# Altium PCB Full_Power_Board.PcbDoc
Units mil, origin at the board's own origin, x right, y up, seen from the top; angles counter-clockwise.
Board outline 5565 x 2850 mil, 4 copper layers (Signal Layer 1, Power Plane, Ground Plane, Signal Layer 2), stack 33.234 mil thick; 140 components, 95 nets, 511 pads, 93 vias.
Unrouted connection lines stored in the file: 1.
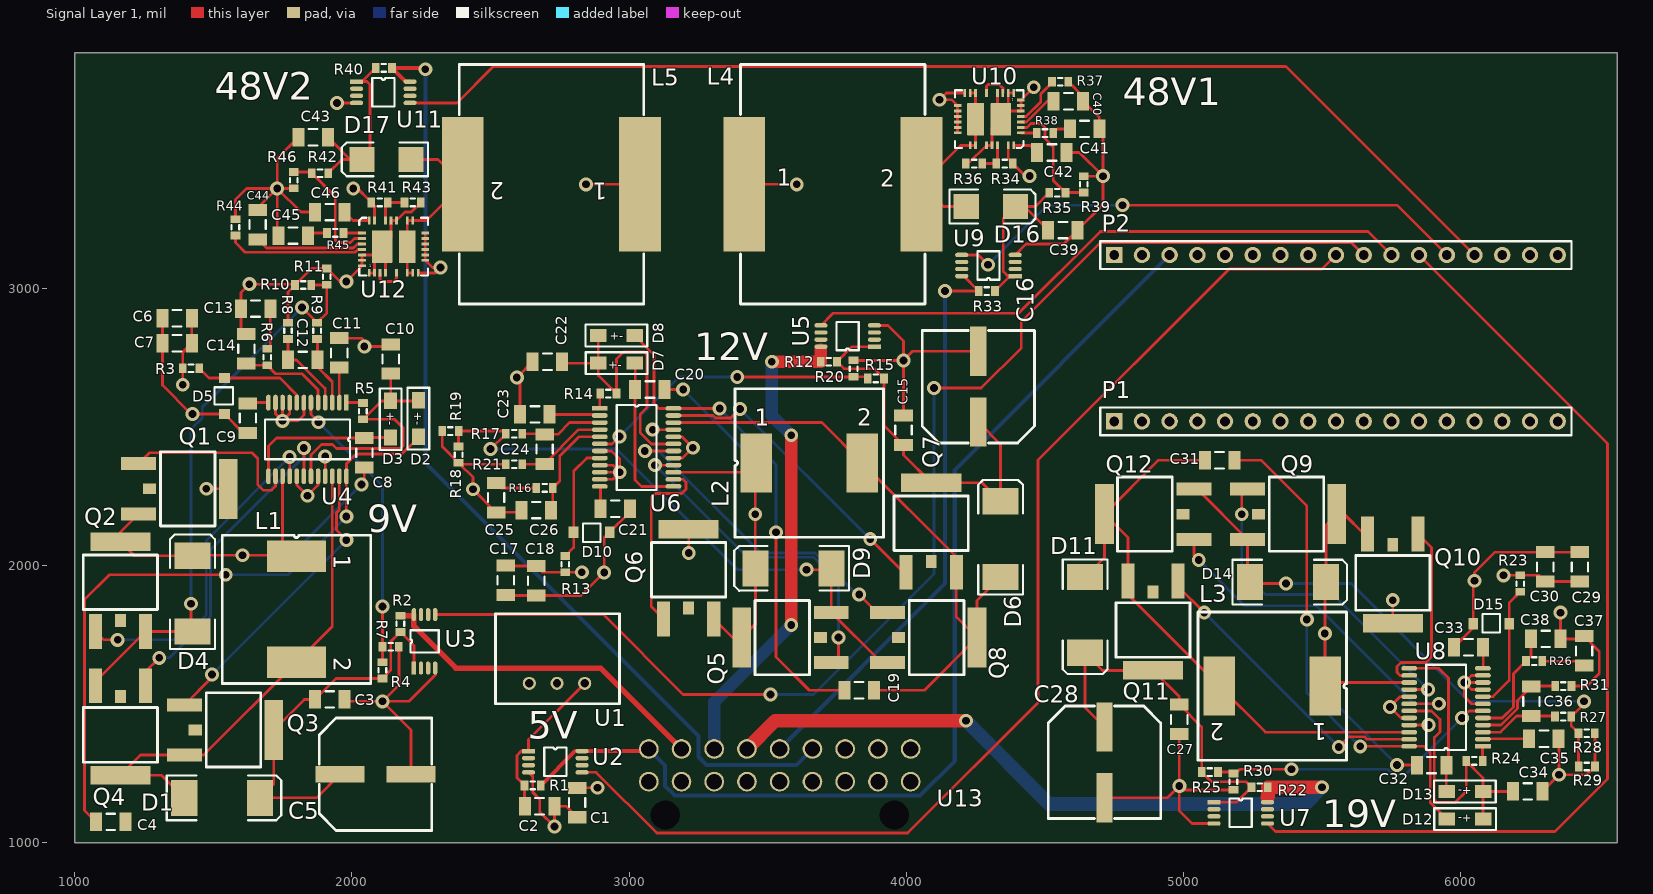
[diagram p0: Signal Layer 1 view]
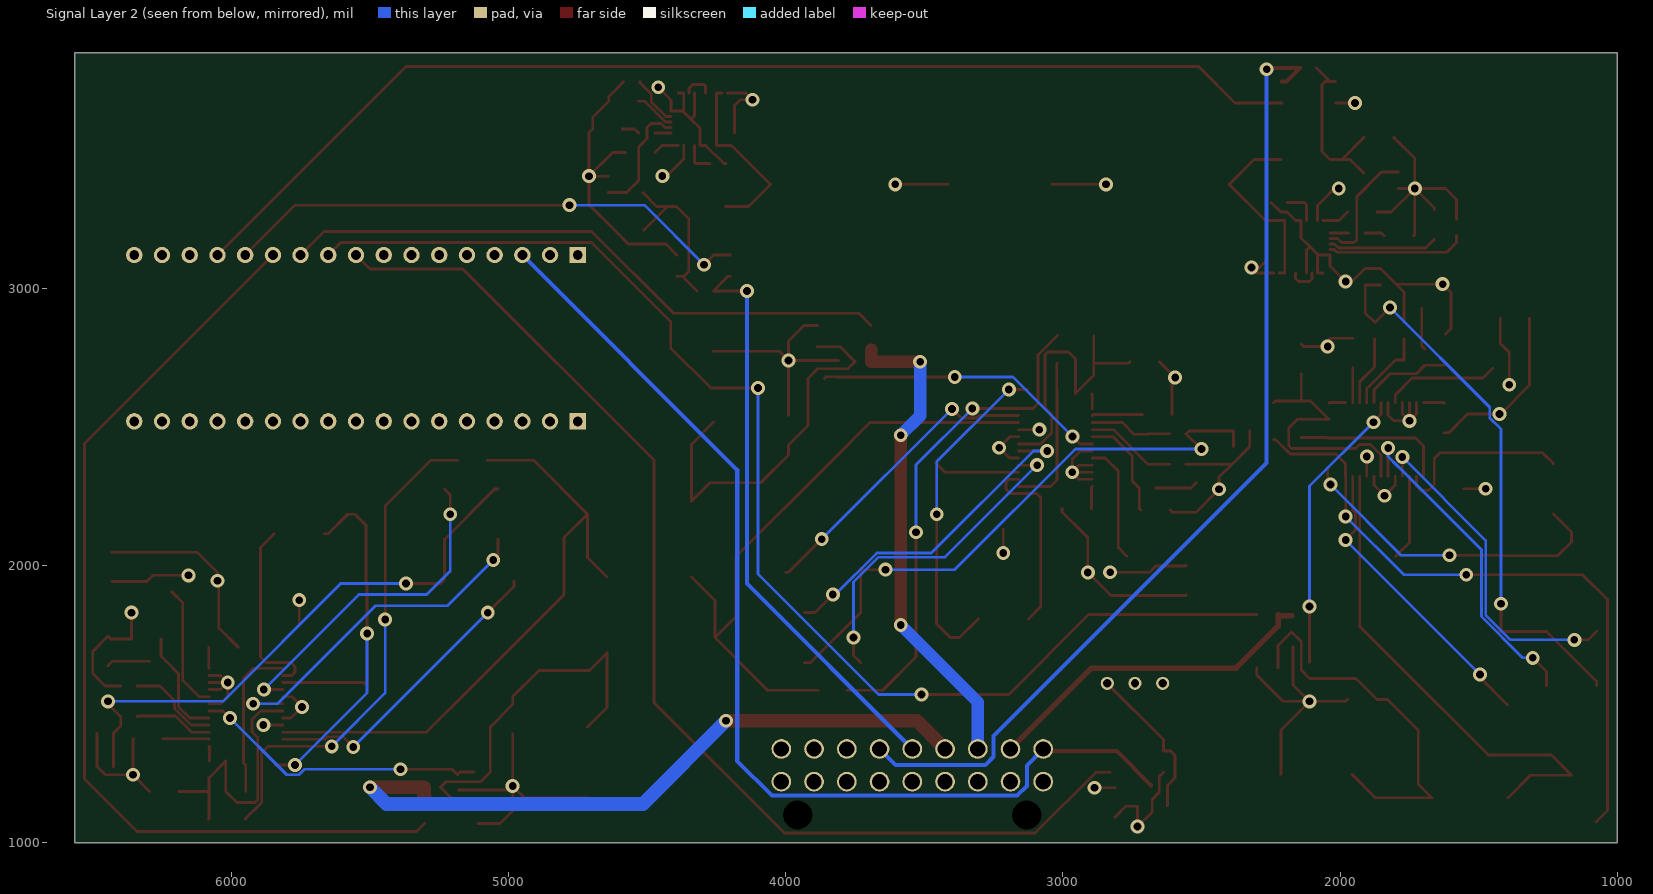
[diagram p1: Signal Layer 2 view, seen from below]
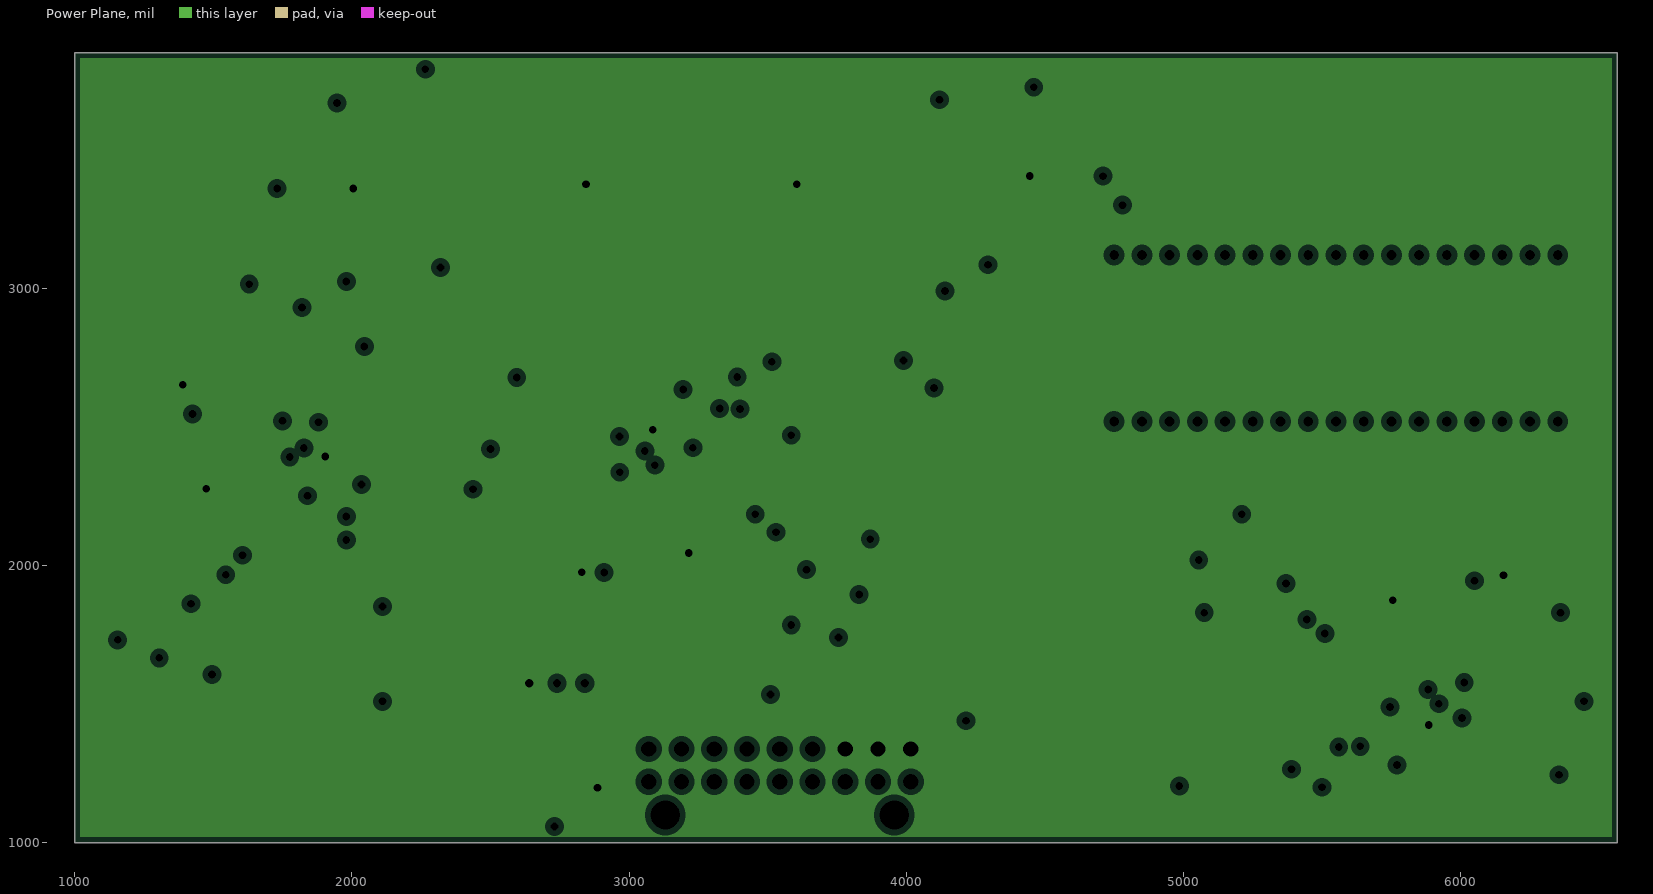
[diagram p2: Power Plane, clearances drawn from the general rule]
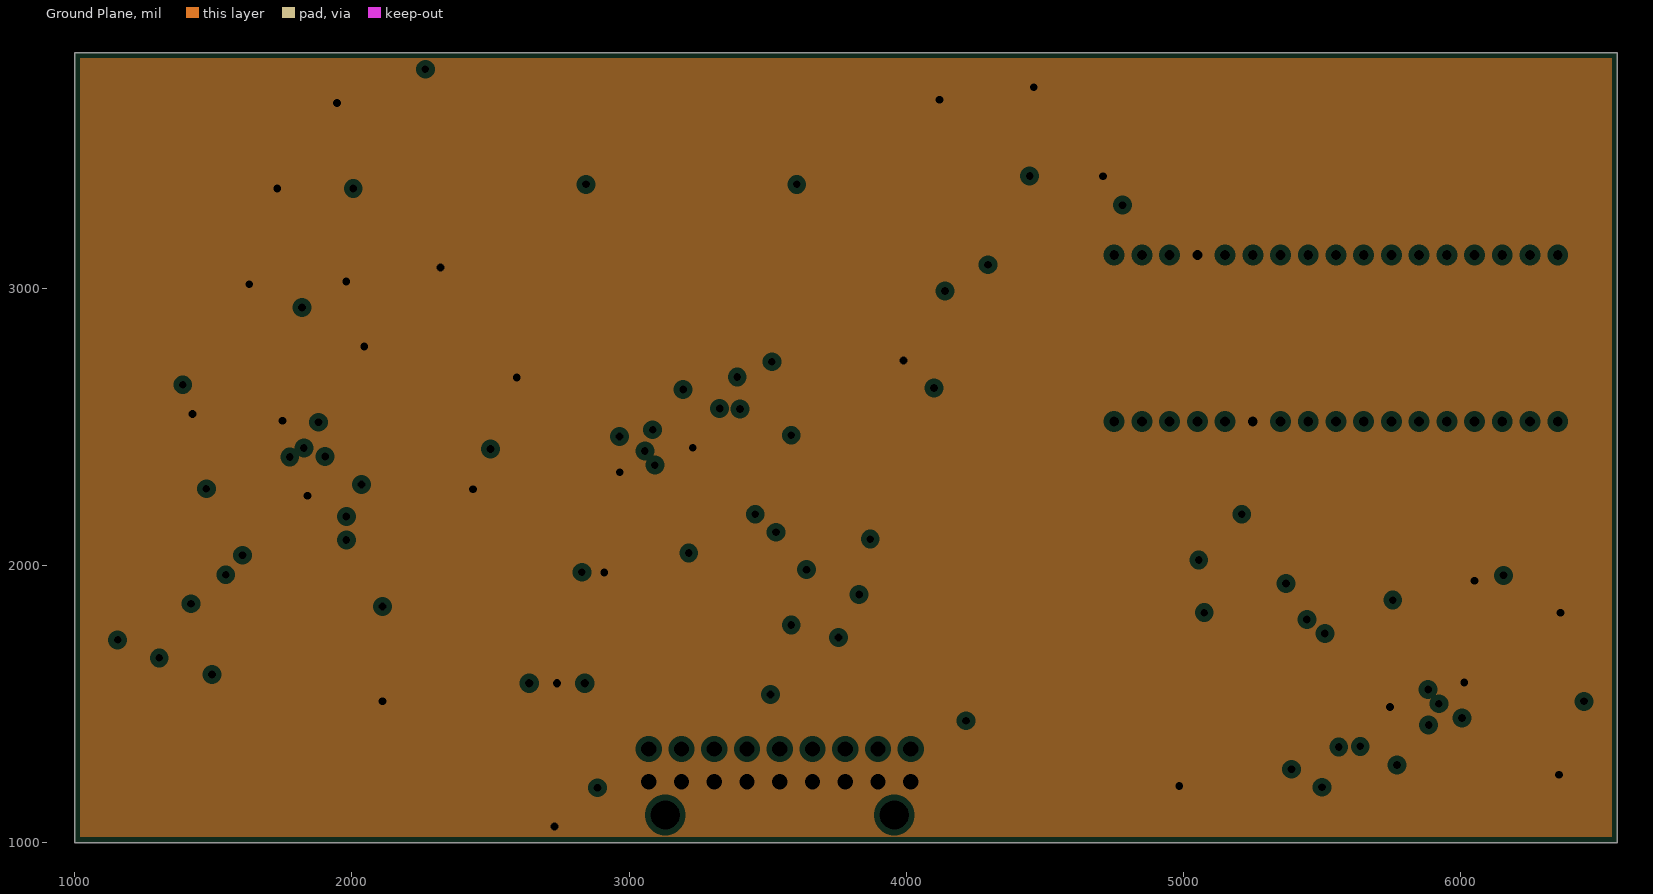
[diagram p3: Ground Plane, clearances drawn from the general rule]

## Layer stack, top to bottom
Top Solder: solder mask 0.4, Solder Resist, Dk 3.5
Signal Layer 1: signal copper 1.4
Dielectric 1: core 12.6, FR-4, Dk 4.8
Power Plane: plane copper 1.417, net 14.8V
Dielectric 3: prepreg 5, Dk 4.2
Ground Plane: plane copper 1.417, net GND
Dielectric 4: core 10, Dk 4.2
Signal Layer 2: signal copper 1.4
Bottom Solder: solder mask 0.4, Solder Resist, Dk 3.5

## Board outline
1000,1000 6565,1000 6565,3850 1000,3850

## Design rules (kind name [scope] priority, off if disabled: settings)
Clearance [All] p1: gap=5 ignorepadtopadclearanceinfootprint=FALSE
PlaneClearance [All] p1: clearance=20
PlaneConnect [All] p1: planeconnectstyle=Relief reliefexpansion=20 reliefentries=4 reliefconductorwidth=10 reliefairgap=10
PolygonConnect [All] p1: connectstyle=Relief reliefconductorwidth=10 reliefentries=4 polygonreliefangle="90 Angle" airgapwidth=10
RoutingVias [All] p1: holewidth=28 width=50 viastyle="Through Hole" minholewidth=28 minwidth=50 maxholewidth=28 maxwidth=50
SolderMaskExpansion [All] p1: expansion=4
Width [All] p1: maxlimit=50 minlimit=10 preferedwidth=10
28 further rules are at their usual default settings.

## Classes and differential pairs
component class 5V: C1 C2 R1 U1 U2
component class 9V: C3 C4 C5 C6 C7 C8 C9 C10 C11 C12 C13 C14 D1 D2 D3 D4 D5 L1 Q1 Q2 Q3 Q4 R2 R3 R4 R5 R6 R7 R8 R9 R10 R11 U3 U4
component class 12V: C15 C16 C17 C18 C19 C20 C21 C22 C23 C24 C25 C26 D6 D7 D8 D9 D10 L2 Q5 Q6 Q7 Q8 R12 R13 R14 R15 R16 R17 R18 R19 R20 R21 U5 U6
component class 19V: C27 C28 C29 C30 C31 C32 C33 C34 C35 C36 C37 C38 D11 D12 D13 D14 D15 L3 Q9 Q10 Q11 Q12 R22 R23 R24 R25 R26 R27 R28 R29 R30 R31 U7 U8
component class 48V_0.5A: C39 C40 C41 C42 D16 L4 R33 R34 R35 R36 R37 R38 R39 U9 U10
component class 48V: C43 C44 C45 C46 D17 L5 R40 R41 R42 R43 R44 R45 R46 U11 U12
component class Arduino: P1 P2
component class Full_Power_Board: U13

## Components (designator, comment, footprint, x,y, rotation, side; value= is the part's Value field where it differs from the comment)
C1 "10uF" C1206 2812.32,1145 r90 top
C2 "10uF" C1206 2677.32,1131.85 r180 top
C3 "Cap Semi" C1206 1920,1516.85 r180 top value=22u
C4 "Cap Semi" C1206 1130,1075 r180 top value=0.22u
C5 "390uF" PCV1E391MCL2GS 2085,1246.85 r90 top
C6 "Cap Semi" C1206 1369.53,2891.85 r0 top value=27u
C7 "Cap Semi" C1206 1369.53,2801.85 r0 top value=3.3u
C8 "Cap Semi" C1206 2045,2406.85 r90 top value=0.22u
C9 "Cap Semi" C1206 1625,2531.85 r90 top value=0.001u
C10 "Cap Semi" C1206 2140,2745 r270 top value=4.7u
C11 "Cap Semi" C1206 1954.53,2766.85 r270 top value=0.001u
C12 "Cap Semi" C1206 1822.68,2741.85 r0 top value=100p
C13 "Cap Semi" C1206 1652.68,2926.85 r0 top value=0.01u
C14 "Cap Semi" C1206 1619.53,2781.85 r270 top value=100p
C15 "Cap Semi" C1206 3990,2488.15 r270 top value=22u
C16 "390uF" PCV1E391MCL2GS 4260,2645 r180 top
C17 "Cap Semi" C1206 2555,1946.85 r90 top value=27u
C18 "Cap Semi" C1206 2665,1945 r90 top value=3.3u
C19 "Cap Semi" C1206 3830,1550 r180 top value=0.22u
C20 "Cap Semi" C1206 3075,2635 r180 top value=0.22u
C21 "Cap Semi" C1206 2950,2205 r180 top value=0.001u
C22 "Cap Semi" C1206 2705,2735 r0 top value=4.7u
C23 "Cap Semi" C1206 2660,2545 r0 top value=0.001u
C24 "Cap Semi" C1206 2695,2420 r90 top value=100p
C25 "Cap Semi" C1206 2520,2245 r90 top value=0.01u
C26 "Cap Semi" C1206 2665,2200 r0 top value=100p
C27 "Cap Semi" C1206 4985,1445 r90 top value=22u
C28 "390uF" PCV1E391MCL2GS 4715,1290 r0 top
C29 "Cap Semi" C1206 6430,1995 r270 top value=27u
C30 "Cap Semi" C1206 6305,1995 r270 top value=3.3u
C31 "Cap Semi" C1206 5130,2380 r0 top value=0.22u
C32 "Cap Semi" C1206 5895,1280 r0 top value=0.22u
C33 "Cap Semi" C1206 6028.15,1705 r0 top value=0.001u
C34 "Cap Semi" C1206 6241.85,1185 r180 top value=4.7u
C35 "Cap Semi" C1206 6300,1375 r180 top value=0.001u
C36 "Cap Semi" C1206 6255,1510 r270 top value=100p
C37 "Cap Semi" C1206 6445,1691.85 r270 top value=0.01u
C38 "Cap Semi" C1206 6306.85,1735 r180 top value=100p
C39 "Cap Semi" C1206 4565,3210 r180 top value=10u
C40 "Cap Semi" C1206 4585,3675 r180 top value=0.01u
C41 "Cap Semi" C1206 4643.15,3575 r180 top value=0.01u
C42 "Cap Semi" C1206 4525,3490 r180 top value=4.7u
C43 "Cap Semi" C1206 1860,3545 r0 top value=10u
C44 "Cap Semi" C1206 1660,3230 r270 top value=0.01u
C45 "Cap Semi" C1206 1788.15,3190 r0 top value=0.01u
C46 "Cap Semi" C1206 1920,3275 r0 top value=4.7u
D1 "MBRS340" SMC 1531.81,1161.85 r0 top
D2 "1N5819HW" 1N5819HW 2240,2530 r270 top
D3 "1N5819HW" 1N5819HW 2140,2527.8 r270 top
D4 "MBRS340" SMC 1425,1898.66 r90 top
D5 "MMSZ5230B" MMSZ5230B 1540,2611.85 r90 top
D6 "MBRS340" SMC 4340,2095 r90 top
D7 "1N5819HW" 1N5819HW 2955,2730 r0 top
D8 "1N5819HW" 1N5819HW 2954.06,2830 r0 top
D9 "MBRS340" SMC 3593.19,1990 r180 top
D10 "MMSZ5230B" MMSZ5230B 2865,2120 r180 top
D11 "MBRS340" SMC 4645,1821.81 r270 top
D12 "1N5819HW" 1N5819HW 6015.94,1085 r180 top
D13 "1N5819HW" 1N5819HW 6015,1185 r180 top
D14 "MBRS340" SMC 5376.81,1940 r0 top
D15 "MMSZ5230B" MMSZ5230B 6110,1790 r0 top
D16 "MBRS360" SMB 4305,3295 r0 top
D17 "MBRS360" SMB 2125,3465 r180 top
L1 "SRR1240-4R7MCT" SRR1240-4R7M 1800,1841.85 r270 top
L2 "SRR1240-4R7MCT" SRR1240-4R7M 3650,2370 r0 top
L3 "SRR1240-4R7MCT" SRR1240-4R7M 5320,1565 r180 top
L4 "IHLP-6767DZ-11" IHLP-6767DZ-11 3415,3375 r0 top
L5 "IHLP-6767DZ-11" IHLP-6767DZ-11 3039.76,3375 r180 top
P1 "Header 17" HDR1X17 4750,2520 r0 top
P2 "Header 17" HDR1X17 4750,3120 r0 top
Q1 "BUK6212-40C" BUK6212-40C 1230.63,2367.4 r270 top
Q2 "BUK6212-40C" BUK6212-40C 1074.45,1762.48 r0 top
Q3 "BUK6212-40C" BUK6212-40C 1395.63,1497.4 r270 top
Q4 "BUK6212-40C" BUK6212-40C 1255.55,1566.22 r180 top
Q5 "BUK6212-40C" BUK6212-40C 3729.37,1649.45 r90 top
Q6 "BUK6212-40C" BUK6212-40C 3124.45,1807.17 r0 top
Q7 "BUK6212-40C" BUK6212-40C 3999.45,1975.63 r0 top
Q8 "BUK6212-40C" BUK6212-40C 3932.17,1830.55 r270 top
Q9 "BUK6212-40C" BUK6212-40C 5230.63,2275.55 r270 top
Q10 "BUK6212-40C" BUK6212-40C 5845.55,2114.37 r180 top
Q11 "BUK6212-40C" BUK6212-40C 4980.55,1944.37 r180 top
Q12 "BUK6212-40C" BUK6212-40C 5037.83,2094.45 r90 top
R1 "Res3" J1-0603 2652.32,1206.85 r0 top value=5m
R2 "Res3" J1-0603 2175,1789.53 r90 top value=2.5m
R3 "Res3" J1-0603 1419.53,2711.85 r180 top value=51k
R4 "Res3" J1-0603 2110,1621.85 r270 top value=205k
R5 "Res3" J1-0603 2040,2556.85 r90 top value=100k
R6 "Res3" J1-0603 1694.53,2751.85 r270 top value=100k
R7 "Res3" J1-0603 2140,1706.85 r180 top value=20k
R8 "Res3" J1-0603 1769.53,2846.85 r90 top value=100
R9 "Res3" J1-0603 1874.53,2846.85 r90 top value=100
R10 "Res3" J1-0603 1824.53,3011.85 r0 top value=0.018
R11 "Res3" J1-0603 1909.53,3041.85 r270 top value=0.018
R12 "Res3" J1-0603 3720.47,2735 r180 top value=2.5m
R13 "Res3" J1-0603 2770,2005 r270 top value=51k
R14 "Res3" J1-0603 2925,2620 r180 top value=100k
R15 "Res3" J1-0603 3890,2675 r0 top value=113k
R16 "Res3" J1-0603 2695,2280 r0 top value=100k
R17 "Res3" J1-0603 2585,2475 r180 top value=100
R18 "Res3" J1-0603 2385,2400 r90 top value=0.018
R19 "Res3" J1-0603 2355.47,2485 r0 top value=0.018
R20 "Res3" J1-0603 3810,2710.47 r270 top value=8.06k
R21 "Res3" J1-0603 2585,2365 r180 top value=100
R22 "Res3" J1-0603 5275,1200 r0 top value=2m
R23 "Res3" J1-0603 6215,1935 r90 top value=51k
R24 "Res3" J1-0603 6049.53,1295 r0 top value=100k
R25 "Res3" J1-0603 5095,1255 r180 top value=113k
R26 "Res3" J1-0603 6265,1655 r180 top value=100k
R27 "Res3" J1-0603 6369.53,1455 r0 top value=100
R28 "Res3" J1-0603 6454.53,1395 r180 top value=0.018
R29 "Res3" J1-0603 6455,1275 r180 top value=0.018
R30 "Res3" J1-0603 5180,1220 r90 top value=2K
R31 "Res3" J1-0603 6370,1565 r0 top value=100
R33 "Res3" J1-0603 4290.47,2990 r180 top value=10m
R34 "Res3" J1-0603 4354.53,3450 r0 top value=392k
R35 "Res3" J1-0603 4545,3345 r180 top value=464k
R36 "Res3" J1-0603 4244.53,3450 r0 top value=53.6k
R37 "Res3" J1-0603 4555,3745 r180 top value=41.2k
R38 "Res3" J1-0603 4500.47,3560 r180 top value=10k
R39 "Res3" J1-0603 4640,3375 r270 top value=15.8k
R40 "Res3" J1-0603 2115,3795 r0 top value=10m
R41 "Res3" J1-0603 2100,3310 r180 top value=392k
R42 "Res3" J1-0603 1885,3415 r0 top value=464k
R43 "Res3" J1-0603 2219.53,3310 r180 top value=53.6k
R44 "Res3" J1-0603 1580,3220 r270 top value=41.2k
R45 "Res3" J1-0603 1940,3200 r0 top value=10k
R46 "Res3" J1-0603 1790,3390 r90 top value=15.8k
U1 "R-78E-0.5" R-78E-0.5 2513.62,1496.26 r0 top
U2 "AD8217" AD8217 2637.56,1330.59 r0 top
U3 "AD8217" AD8217 2223.82,1630 r90 top
U4 "LTC3780EG#PBF" "LTC3780 24-Leaqd Plastic SSOP" 1980.32,2587.6 r270 top
U5 "AD8217" AD8217 3885,2789.41 r180 top
U6 "LTC3780EG#PBF" "LTC3780 24-Leaqd Plastic SSOP" 2894.25,2566.77 r0 top
U7 "AD8217" AD8217 5110,1146.18 r0 top
U8 "LTC3780EG#PBF" "LTC3780 24-Leaqd Plastic SSOP" 6080,1347.64 r180 top
U9 "AD8217" AD8217 4392.91,3043.82 r180 top
U10 "LT3958EUHE#PBF" LT3958 4387.8,3704.49 r180 top
U11 "AD8217" AD8217 2017.09,3745.59 r0 top
U12 "LT3958EUHE#PBF" LT3958 2062.2,3055.51 r0 top
U13 "Power Connections" "Molex Connector" 3070.94,1338.19 r0 top

## Footprints (in the part's own frame and the unit in brackets; to place one, negate y for a bottom-side part, rotate by r counter-clockwise, add the part's x,y. Pads: shape width x height; smd on the part's side, far side on the other; paste and mask are expansions set on the pad)
1N5819HW [mm]
  rect 1.5x1.2 smd: 1(-1.675,0) 2(1.675,0)
  silkscreen extent -2.83,-1 2.83,1
AD8217 [mm]
  rect 1.2x0.4 smd: 1(0,0)
  oval 1.2x0.4 smd: 2(0,-0.65) 3(0,-1.3) 4(0,-1.95) 5(4.9,-1.95) 6(4.9,-1.3) 7(4.9,-0.65) 8(4.9,0)
  silkscreen extent 1.43,-2.28 3.47,0.33
BUK6212-40C [mm]
  rect 1.2x3.2 smd: 1(0,0) 2(4.6,0)
  rect 5.5x1.7 smd: 3(2.3,8.2)
  rect 1x1.2 smd: 3(2.3,1)
  silkscreen extent -1.1,2 5.7,7
C1206 [mm] "Chip Capacitor, Body 3.2x1.6mm, IPC High Density"
  rect 1.1x1.7 smd: 1(-1.35,0) 2(1.35,0)
  silkscreen extent -0.4,-0.75 0.4,0.75, body extent -1.7,-0.9 1.7,0.9, height 1.3
HDR1X17 [mm] "Connector; Header; 17 Position"
  rect 1.5x1.5 hole 0.9: 1(0,0)
  round 1.5 hole 0.9: 2(2.54,0) 3(5.08,0) 4(7.62,0) 5(10.16,0) 6(12.7,0) 7(15.24,0) 8(17.78,0) 9(20.32,0) 10(22.86,0) 11(25.4,0) 12(27.94,0) 13(30.48,0) 14(33.02,0) 15(35.56,0) 16(38.1,0) 17(40.64,0)
  silkscreen extent -1.27,-1.27 41.91,1.27
IHLP-6767DZ-11 [mm]
  rect 3.825x12.32 smd: 1(0,0) 2(16.25,0)
  silkscreen extent -0.33,-10.97 16.57,10.97
J1-0603 [mm] "Chip Resistor, Body 1.6x0.8mm, IPC High Density"
  rect 0.7x0.9 smd: 1(-0.75,0) 2(0.75,0)
  silkscreen extent -0.2,-0.35 0.2,0.35, body extent -0.85,-0.48 0.85,0.48, height 0.9
LT3958 [mm]
  rect 0.25x0.7 smd mask+0.085: 1(0,0)
  rect 0.25x0.7 smd: 2(0.5,0) 3(1,0) 4(1.5,0) 6(2.5,0) 8(3.5,0) 9(4,0) 10(4.5,0) 20(4,4.8) 21(3.5,4.8) 23(2.5,4.8) 24(2,4.8) 25(1.5,4.8) 27(0.5,4.8) 28(0,4.8)
  rect 0.7x0.25 smd: 12(5.15,1.15) 13(5.15,1.65) 14(5.15,2.15) 15(5.15,2.65) 16(5.15,3.15) 17(5.15,3.65) 30(-0.65,3.65) 31(-0.65,3.15) 32(-0.65,2.65) 33(-0.65,2.15) 34(-0.65,1.65) 35(-0.65,1.15)
  rect 0.7x0.25 smd mask+0.085: 36(-0.65,0.65)
  rrect10% 1.875x3 smd: 37(1.188,2.4)
  rrect10% 1.53x3 smd paste+0: 38(3.5,2.4)
  silkscreen extent -0.9,-0.25 5.4,5.05
"LTC3780 24-Leaqd Plastic SSOP" [mm]
  rect 1.45x0.42 smd: 1(0,0)
  oval 1.45x0.42 smd: 2(0,-0.65) 3(0,-1.3) 4(0,-1.95) 5(0,-2.6) 6(0,-3.25) 7(0,-3.9) 8(0,-4.55) 9(0,-5.2) 10(0,-5.85) 11(0,-6.5) 12(0,-7.15) 13(6.75,-7.15) 14(6.75,-6.5) 15(6.75,-5.85) 16(6.75,-5.2) 17(6.75,-4.55) 18(6.75,-3.9) 19(6.75,-3.25) 20(6.75,-2.6) 21(6.75,-1.95) 22(6.75,-1.3) 23(6.75,-0.65) 24(6.75,0)
  silkscreen extent 1.56,-7.48 5.19,0.33
MMSZ5230B [mm]
  rect 0.9x1.025 smd: 1(-1.65,0) 2(1.65,0)
  silkscreen extent -0.8,-0.8 0.8,0.9
"Molex Connector" [mm]
  round 1.8 hole 1.4: 1(0,-3) 2(3,-3) 3(6,-3) 4(9,-3) 5(12,-3) 6(15,-3) 7(18,-3) 8(21,-3) 9(24,-3) 10(0,0) 11(3,0) 12(6,0) 13(9,0) 14(12,0) 15(15,0) 16(18,0) 17(21,0) 18(24,0)
  round 0 hole 2.7 paste+0 mask+0: ""(1.5,-6.05) ""(22.5,-6.05)
  body extent -1.84,-17.59 25.88,3.39, height 10.53
PCV1E391MCL2GS [mm]
  rect 1.5x4.5 smd: 1(0,3.25) 2(0,-3.25)
  silkscreen extent -5.15,-5.15 5.15,5.15
R-78E-0.5 [mm]
  round 1.2 hole 0.762: 1(3.21,2) 2(5.75,2) 3(8.29,2)
  silkscreen extent 0.13,0.13 11.48,8.37
SMB [mm] "DO-214-AA/SMB; 2 C-Bend Leads; Body 5.3 x 3.6 mm, inc. leads (LxW)"
  rect 2.3x2.3 smd: 1(-2.25,0) 2(2.25,0)
  silkscreen extent -3.8,-1.55 4.1,1.55
SMC [mm] "DO-214-AB/SMC; 2 C-Bend Leads; Body 7.9 x 5.9 mm, inc. leads (LxW)"
  rect 2.4x3.3 smd: 1(-3.475,0) 2(3.475,0)
  silkscreen extent -5.07,-2.05 5.43,2.05
SRR1240-4R7M [mm]
  rect 2.9x5.4 smd: 1(-4.85,0) 2(4.85,0)
  silkscreen extent -6.8,-6.8 6.8,6.8

## Part data
C1 C2: library part "Cap Semi", "Capacitor (Semiconductor SIM Model)", LatestRevisionDate=29-May-2009, LatestRevisionNote="IPC-7351 Footprint Added.", PackageDescription="Chip Capacitor", PackageReference=C1206, Published=8-Jun-2000, Publisher="Altium Limited"
C3 C4 C6 C7 C8 C9 C10 C11 C12 C13 C14 C15 C17 C18 C19 C20 C21 C22 C23 C24 C25 C26 C27 C29 C30 C31 C32 C33 C34 C35 C36 C37 C38 C39 C40 C41 C42 C43 C44 C45 C46: "Capacitor (Semiconductor SIM Model)", LatestRevisionDate=29-May-2009, LatestRevisionNote="IPC-7351 Footprint Added.", PackageDescription="Chip Capacitor", PackageReference=C1206, Published=8-Jun-2000, Publisher="Altium Limited"
C5 C16 C28: library part PCV1E391MCL2GS, "Aluminum Capacitor"
D1 D4 D6 D9 D11 D14: library part Diode, "Default Diode", Code_JEDEC=DO-214-AB, LatestRevisionDate=17-Jul-2002, LatestRevisionNote="Re-released for DXP Platform.", PackageDescription="DO-214-AB/SMC; 2 C-Bend Leads; Body 7.9 x 5.9 mm, inc. leads (LxW)", PackageReference=SMC, PackageVersion=Sep-1996, Published=8-Jun-2000, Publisher="Altium Limited"
D2 D3 D7 D8 D12 D13: "1A Schottky Barrier Rectifier"
D5 D10 D15: "Zener Diode"
D16 D17: library part "D Schottky", "Schottky Diode", Code_JEDEC=DO-214-AA, LatestRevisionDate=17-Jul-2002, LatestRevisionNote="Re-released for DXP Platform.", PackageDescription="DO-214-AA/SMB; 2 C-Bend Leads; Body 5.3 x 3.6 mm, inc. leads (LxW)", PackageReference=SMB, Published=8-Jun-2000, Publisher="Altium Limited"
L1 L2 L3 L4 L5: "Inductor"
P1 P2: "Header, 17-Pin", LatestRevisionDate=17-Jul-2002, LatestRevisionNote="Re-released for DXP Platform.", Publisher="Altium Limited"
Q1 Q2 Q3 Q4 Q5 Q6 Q7 Q8 Q9 Q10 Q11 Q12: "N-Channel TrenchMOS Intermediate Level FET"
R1 R2 R3 R4 R5 R6 R7 R8 R9 R10 R11 R12 R13 R14 R15 R16 R17 R18 R19 R20 R21 R22 R23 R24 R25 R26 R27 R28 R29 R30 R31 R33 R34 R35 R36 R37 R38 R39 R40 R41 R42 R43 R44 R45 R46: "Resistor", LatestRevisionDate=29-May-2009, LatestRevisionNote="IPC-7351 Footprint Added.", PackageDescription="Chip Resistor", PackageReference=J1-0603, Published=8-Jun-2000, Publisher="Altium Limited"
U1: "DC/DC Converter"
U2 U3 U5 U7 U9 U11: "Current Shunt Moniter"
U4 U6 U8: "Buck-boost Controller, Constant Frequency, Current Mode Control with Power Good Output, 24-pin SOP (G-24), -40 to 85 degC, Pb-Free", Frequency Sync Range="200kHz - 400kHz", Manufacturer="Linear Technology", PackageDesciption="24-Pin Plastic SSOP, Body 8.2 x 5.3 mm, Pitch 0.65 mm", Supplier Part Number 1=LTC3780EG#PBF-ND, ComponentLink1Description="Manufacturer URL", ComponentLink1URL=http://www.linear.com/, ComponentLink2Description=Datasheet, ComponentLink2URL=http://cds.linear.com/docs/en/datasheet/3780ff.pdf, ComponentLink3Description="Package Specification", ComponentLink3URL=http://cds.linear.com/docs/en/packaging/SSOP_24_05-08-1640.pdf, DatasheetVersion="Rev. F", Mounting Technology="Surface Mount", Number of Outputs=1, PackageReference=G-24, PackageVersion=Jun-10, PartNumber=LTC3780EG#PBF, RoHS=TRUE, Supplier 1=Digi-Key, Supplier 2=Farnell, Supplier 3=Newark, Supplier Part Number 2=1273545, Supplier Part Number 3=56M8395
U10 U12: "LT3958", Frequency Adjust Range="100kHz - 1MHz", Manufacturer="Linear Technology", Supplier Part Number 1=LT3958EUHE#PBF-ND, ComponentLink1Description="Manufacturer URL", ComponentLink1URL=http://www.linear.com/, ComponentLink2Description=Datasheet, ComponentLink2URL=http://cds.linear.com/docs/en/datasheet/3958f.pdf, ComponentLink3Description="Package Specification", ComponentLink3URL=http://cds.linear.com/docs/en/packaging/QFN_28_05-08-1836.pdf, Mounting Technology="Surface Mount", Number of Outputs=1, PackageDescription="28-Pin Plastic QFN, Body 5 x 6 mm, Pitch 0.5 mm", PackageReference=UHE-36, PackageVersion="Rev. D, 02/2012", PartNumber=LT3958EUHE#PBF, RoHS=TRUE, Supplier 1=Digi-Key, Supplier 2=Farnell, Supplier 3=Newark, Supplier Part Number 2=2294964, Supplier Part Number 3=78R9566
U13: library part "Molex Connector"

## Via types
v1: diameter 50, hole 28, Signal Layer 1 to Signal Layer 2, 93 vias

## Nets (pads, with @x,y where several pads share a name; then routed paths per layer and width w, separated by ;. In a path a pad name is that pad's centre, name@x,y a point inside that pad or via, vN(x,y) a via of type N, cw(c..) or ccw(c..) an arc to the next point about the centre after c; other vN are vias at no path point)
14.8V: C1.2 C6.2 C7.2 C17.2 C18.2 C29.2 C30.2 L4.1 L5.1 Q1.3@1553.46,2276.85 Q6.3@3215,2130 Q10.3@5755,1791.54 R3.2 R13.2 R23.2 R34.2 R41.2 U1.1 U4.21 U6.21 U8.21 U10.27 U12.27 U13.16 U13.17 U13.18 | length 2064.2
  Signal Layer 1 w10: v1(1390,2651.85) R3.2 1390,2769.17 C7.2 C6.2 ; v1(1475,2276.85) Q1.3@1553.46,2276.85 ; U4.21 v1(1903.54,2393.31) ; v1(2005,3360) 2005,3364.53 2010.47,3370 R41.2 2081.89,3298.58 U12.27 ; C17.2 2556.85,1998.15 C18.2 2687.68,1975.47 R13.2 v1(2829.53,1975.47) ; C1.2 v1(2886.02,1198.15) ; v1(2845,3375) L5.1 ; v1(3085,2490) U6.21 ; v1(3215,2045) Q6.3@3215,2130 ; L4.1 v1(3605,3375) ; U10.27 4368.11,3465.94 R34.2 4429.06,3405 v1(4445,3405) ; Q10.3@5755,1791.54 v1(5755,1875) ; U8.21 v1(5884.41,1424.41) ; v1(6154.53,1964.53) R23.2 6282.32,1964.53 C30.2 C29.2
BG1-9V: Q4.1 U4.18 | length 1217.4
  Signal Layer 1 w10: Q4.1 1255.55,1617.4 v1(1305,1666.85) ; U4.18 v1(1826.77,2423.62)
  Signal Layer 2 w10: v1(1305,1666.85) 1341.21,1666.85 1490,1815.64 1490,2056.85 1789.41,2356.26 1790.09,2356.26 1826.77,2392.94 v1(1826.77,2423.62)
BG2-9V: Q2.1 U4.16 | length 1213.8
  Signal Layer 1 w10: Q2.1 1105.08,1731.85 v1(1155,1731.85) ; U4.16 v1(1775.59,2391.26)
  Signal Layer 2 w10: v1(1155,1731.85) 1385,1731.85 1475,1821.85 1475,2090.67 v1(1775.59,2391.26)
GND: C1.1 C2.1 C3.1 C5.2 C6.1 C7.1 C9.1 C10.1 C11.1 C13.1 C14.1 C15.1 C16.2 C17.1 C18.1 C21.1 C22.1 C23.1 C25.1 C26.1 C27.1 C28.2 C29.1 C30.1 C33.1 C34.1 C35.1 C37.1 C38.1 C39.1 C40.1 C41.1 C42.1 C43.1 C44.1 C45.1 C46.1 D5.1 D10.1 D15.1 P1.6 P2.4 R7.1 R8.2 R10.1 R11.1 R18.1 R19.1 R20.1 R21.2 R28.1 R29.1 R30.1 R31.2 R36.1 R37.1 R39.1 R43.1 R44.1 R46.1 U1.2 U2.4 U3.4 U4.7 U4.9 U4.10 U4.11 U4.17 U4.20 U5.4 U6.7 U6.9 U6.10 U6.11 U6.17 U6.20 U7.4 U8.7 U8.9 U8.10 U8.11 U8.17 U8.20 U9.4 U10.1 U10.2 U10.4 U10.10 U10.12 U10.13 U10.14 U10.15 U10.16 U10.17 U10.23 U10.24 U10.34 U10.35 U10.36 U10.37 U11.4 U12.1 U12.2 U12.4 U12.10 U12.12 U12.13 U12.14 U12.15 U12.16 U12.17 U12.23 U12.24 U12.34 U12.35 U12.36 U12.37 U13.1 U13.2 U13.3 U13.4 U13.5 U13.6 U13.7 U13.8 U13.9 | length 13332.1
  Signal Layer 1 w10: C6.1 C7.1 1316.38,2650.47 1420,2546.85 v1(1425,2546.85) v1(1425,2546.85) D5.1 1608.19,2478.7 C9.1 ; R44.1 1580,3320 1620.47,3360.47 v1(1730.47,3360.47) ; C14.1 1599.53,2855 C13.1 1599.53,2984.53 v1(1630,3015) 1791.85,3015 R10.1 ; C44.1 1660,3290 v1(1730.47,3360.47) ; U4.11 1724.41,2547.44 v1(1750,2521.85) ; C45.1 1730.47,3194.53 v1(1730.47,3360.47) ; U4.10 v1(1750,2521.85) ; R8.2 1769.53,2986.38 R10.1 ; U4.9 1775.59,2547.44 v1(1750,2521.85) ; R46.1 v1(1730.47,3360.47) ; U4.17 1801.18,2290.67 v1(1840,2251.85) 1877.95,2289.8 U4.20 ; C43.1 1730.47,3468.62 v1(1730.47,3360.47) ; U4.7 1826.77,2543.62 1805,2521.85 v1(1750,2521.85) ; C46.1 1815.94,3275 v1(1730.47,3360.47) ; v1(1946.18,3668.82) U11.4 ; C11.1 2034.45,2820 2045,2809.45 v1(2045,2790) 2131.85,2790 C10.1 ; C3.1 1980,1510 v1(2110,1510) ; U12.1 U12.2 U12.37@2081.89,3122.93 ; U12.4 2121.26,3137.7 U12.37 ; R7.1 2169.53,1569.53 v1(2110,1510) ; C5.2 2212.95,1407.05 v1(2110,1510) ; U12.10 2300.51,3055.51 v1(2320,3075) 2290.75,3075 U12.12 U12.13 U12.14 U12.15 U12.16 U12.17 ; R43.1 2214.06,3275 2191.14,3275 U12.23 U12.24 2140.94,3181.99 U12.37 ; U3.4 2300.59,1605.59 2205,1510 v1(2110,1510) ; R19.1 2325.94,2429.53 R18.1 ; C17.1 2556.85,1891.85 C18.1 2826.85,1891.85 v1(2910,1975) 2910,2100.04 D10.1 3003.15,2193.19 C21.1 ; R21.2 2390.47,2365 2436.85,2318.62 v1(2436.85,2275) C25.1 2603.7,2191.85 C26.1 ; C23.1 2606.85,2666.3 v1(2595,2678.15) C22.1 ; U2.4 2652.32,1239.06 2652.32,1181.85 2677.32,1156.85 2677.32,1111.85 v1(2730.47,1058.7) C2.1 2772.32,1131.85 C1.1 ; U6.11 2940.87,2310.87 v1(2966.46,2336.46) ; U6.10 v1(2966.46,2336.46) ; U6.9 2940.87,2362.05 v1(2966.46,2336.46) ; U6.7 2936.77,2413.23 2966.46,2383.54 v1(2966.46,2336.46) ; U6.17 3192.64,2387.64 v1(3230,2425) 3190.59,2464.41 U6.20 ; R20.1 v1(3990,2740) ; U5.4 3933.82,2866.18 3990,2810 v1(3990,2740) ; C15.1 v1(3990,2740) ; U10.17 U10.16 U10.15 U10.14 U10.13 U10.12 4164.25,3680 v1(4120,3680) 4144.49,3704.49 U10.10 ; R36.1 4223.19,3450 4288.7,3515.51 U10.23 U10.24 4309.06,3578.01 U10.37 ; C16.2 4022.95,2772.95 v1(3990,2740) ; U10.4 4328.74,3622.3 U10.37 ; U10.1 U10.2 U10.37@4368.11,3637.07 ; U9.4 4432.32,3160 4568.15,3160 C39.1 4709.53,3301.38 v1(4709.53,3404.53) ; v1(4460,3725.51) U10.36 U10.35 U10.34 4370.57,3639.53 U10.37@4368.11,3637.07 ; C42.1 4624.06,3490 v1(4709.53,3404.53) ; R37.1 4638.15,3691.38 C40.1 4696.3,3616.85 C41.1 4709.53,3561.77 v1(4709.53,3404.53) ; R39.1 v1(4709.53,3404.53) ; C28.2 4942.05,1162.05 v1(4985,1205) ; C27.1 v1(4985,1205) ; U7.4 5030.59,1069.41 4985,1115 v1(4985,1205) ; R30.1 4999.53,1190.47 v1(4985,1205) ; U8.20 5785,1450 v1(5745,1490) 5781.77,1526.77 U8.17 ; C33.1 6045.04,1775.04 D15.1 6045.04,1940.04 v1(6050,1945) 6050,1975 6123.15,2048.15 C30.1 C29.1 ; U8.7 6038.82,1501.18 6012.95,1527.05 v1(6012.95,1577.95) ; U8.9 6038.54,1552.36 v1(6012.95,1577.95) ; U8.10 v1(6012.95,1577.95) ; U8.11 6038.54,1603.54 v1(6012.95,1577.95) ; C34.1 v1(6355,1245) ; C35.1 6355,1373.15 v1(6355,1245) ; v1(6360,1830) C38.1 6435,1735 C37.1 6500,1690 6500,1610 6455,1565 R31.2 ; R28.1 6484.06,1275.47 R29.1 6454.53,1245 v1(6355,1245) ; R10.1 1854.53,3071.38 R11.1 1956.42,3024.49 v1(1980,3024.49) U12.36 U12.35 U12.34 2079.43,3120.47 U12.37@2081.89,3122.93 ; U12.37@2081.89,3122.93 U12.37 ; U10.37 U10.37@4368.11,3637.07
NetC2_2: C2.2 R1.1 U1.3 U2.1 | length 569.9
  Signal Layer 1 w10: C2.2@2622.8,1133.23 R1.1 2595.47,1234.17 2595.47,1315 2611.06,1330.59 U2.1 2637.56,1372.56 U1.3
NetC3_2: C3.2 C5.1 D1.2 Q3.3@1718.46,1406.85 R2.1 R4.2 U3.1 | length 1402.5
  Signal Layer 1 w10: C5.1 1872.05,1161.85 D1.2 1718.46,1211.69 1718.46,1406.85 1828.46,1516.85 C3.2 1942.32,1592.32 R4.2 2140,1622.32 2140,1725 R2.1 2223.82,1711.18 U3.1
NetC4_1: C4.1 D1.1 L1.2 Q3.2 Q4.3@1165,1243.39 U4.22 | length 1792
  Signal Layer 1 w10: D1.1 1313.46,1243.39 1165,1243.39 1237.91,1316.3 Q3.2 1465.39,1316.3 L1.2 1929.13,1780.04 U4.22
NetC4_2: C4.2 D2.2 U4.24 | length 2375
  Signal Layer 1 w10: C4.2 1035,1116.85 1035,1876.85 1125,1966.85 v1(1545,1966.85) ; v1(1980,2176.85) 1980,2321.53 U4.24 1980.32,2367.17 2015,2401.85 2180,2401.85 2233.15,2455 D2.2@2240,2455
  Signal Layer 2 w10: v1(1545,1966.85) 1770,1966.85 v1(1980,2176.85)
NetC8_1: C8.1 D4.2 L1.1 Q1.2 Q2.3@1165,2085.31 U4.15 | length 1691.7
  Signal Layer 1 w10: Q1.2 1165,2120.67 1165,2085.31 1214.84,2035.47 D4.2 1426.38,2036.85 v1(1605,2036.85) L1.1@1795.94,2036.85 ; U4.15 1750,2082.8 L1.1@1795.94,2036.85 ; L1.1 L1.1@1795.94,2036.85 ; v1(2035,2291.85) 2045,2301.85 C8.1
  Signal Layer 2 w10: v1(1605,2036.85) 1780,2036.85 v1(2035,2291.85)
NetC8_2: C8.2 D3.2 U4.13 | length 562.9
  Signal Layer 1 w10: U4.13 1698.82,2430.67 1728.15,2460 C8.2 2046.85,2461.85 D3.2
NetC9_2: C9.2 U4.12 | length 74.9
  Signal Layer 1 w10: C9.2 1627.6,2587.6 U4.12
NetC10_2: C10.2 D2.1 D3.1 R5.1 U4.19 | length 987
  Signal Layer 1 w10: U4.19 1852.36,2399.21 1890,2436.85 1930,2436.85 1945,2421.85 2175,2421.85 2185,2431.85 2185,2496.85 2154.53,2527.32 R5.1 2106.42,2593.74 D3.1 ; C10.2 D3.1 ; D2.1@2240,2586.89 2233.15,2593.74 D3.1
NetC11_2: C11.2 U4.2 | length 126.2
  Signal Layer 1 w10: C11.2 1954.53,2587.8 U4.2
NetC12_1: C12.1 R8.1 U4.4 | length 303.1
  Signal Layer 1 w10: R8.1 C12.1 1800,2741.85 1903.54,2638.31 U4.4
NetC12_2: C12.2 R9.1 U4.3 | length 252.3
  Signal Layer 1 w10: R9.1 1875.83,2816.02 C12.2 1875.83,2716.02 1929.13,2662.72 U4.3
NetC13_2: C13.2 R6.1 | length 150.2
  Signal Layer 1 w10: R6.1 1705.83,2792.68 C13.2
NetC14_2: C14.2 R6.2 U4.5 | length 344
  Signal Layer 1 w10: C14.2 1625.91,2722.32 R6.2 1725,2691.85 1820,2691.85 1877.95,2633.9 U4.5
NetC15_2: C15.2 C16.1 D6.2 Q7.3@4090,2298.46 R12.1 R15.2 U5.1 | length 1395
  Signal Layer 1 w10: U5.1 3804.41,2789.41 R12.1 3775,2710 3884.53,2710 R15.2 3919.53,2505.47 C15.2 3990,2398.46 4090,2298.46 4273.35,2298.46 D6.2 4340,2437.05 C16.1
NetC19_1: C19.1 D6.1 L2.2 Q7.2 Q8.3@4255,1740 U6.22 | length 2246.7
  Signal Layer 1 w10: U6.22 3695.35,2515.59 L2.2 4180.55,2030.39 Q7.2 4180.55,1814.45 Q8.3@4255,1740 ; C19.1 4065,1550 Q8.3@4255,1740 ; D6.1 4255,1873.19 Q8.3@4255,1740
NetC19_2: C19.2 D8.2 U6.24 | length 1795.8
  Signal Layer 1 w10: D8.2 3090,2760 3090,2585 3108.23,2566.77 U6.24 v1(3326.77,2566.77) ; v1(3530,2120) 3530,1670 3650,1550 C19.2
  Signal Layer 2 w10: v1(3326.77,2566.77) 3530,2363.54 v1(3530,2120)
NetC20_1: C20.1 D9.2 L2.1 Q5.3@3406.54,1740 Q6.2 U6.15 | length 1713.5
  Signal Layer 1 w10: C20.1 v1(3195,2635) ; U6.15 3425.51,2336.46 L2.1@3455,2365.94 ; Q6.2 3372.72,1740 3406.54,1740 3456.38,1789.84 D9.2 3455,1991.38 v1(3455,2185) L2.1@3455,2365.94 ; L2.1 L2.1@3455,2365.94
  Signal Layer 2 w10: v1(3195,2635) 3455,2375 v1(3455,2185)
NetC20_2: C20.2 D7.2 U6.13 | length 569.9
  Signal Layer 1 w10: D7.2 3021.85,2729.09 C20.2 3021.77,2634.92 3021.77,2308.23 3044.72,2285.28 U6.13
NetC21_2: C21.2 U6.12 | length 81.4
  Signal Layer 1 w10: U6.12 2896.85,2282.68 C21.2
NetC22_2: C22.2 D7.1 D8.1 R14.1 U6.19 | length 1046.3
  Signal Layer 1 w10: C22.2 2763.15,2730 D7.1 ; D8.1@2889.06,2829.06 D7.1 ; U6.19 3081.18,2438.82 3040,2480 3040,2545 3065,2570 3065,2760 3055,2770 2980,2770 2954.53,2744.53 R14.1 2889.06,2685.47 D7.1
NetC23_2: C23.2 U6.2 | length 182.7
  Signal Layer 1 w10: C23.2 2890.43,2545 U6.2
NetC24_1: C24.1 R21.1 U6.4 | length 331.5
  Signal Layer 1 w10: R21.1 2693.15,2365 C24.1 2818.15,2490 U6.4
NetC24_2: C24.2 R17.1 U6.3 | length 298.1
  Signal Layer 1 w10: R17.1 2693.15,2475 C24.2 2743.15,2473.15 2785.59,2515.59 U6.3
NetC25_2: C25.2 R16.1 | length 153
  Signal Layer 1 w10: C25.2 2538.15,2280 R16.1
NetC26_2: C26.2 R16.2 U6.5 | length 381.2
  Signal Layer 1 w10: C26.2 2724.53,2206.38 R16.2 2750,2305.47 2750,2395 2819.41,2464.41 U6.5
NetC27_2: C27.2 C28.1 D11.2 Q11.3@4890,1621.54 R22.1 R25.2 U7.1 | length 1367.1
  Signal Layer 1 w10: C28.1 4645,1487.95 D11.2 4708.46,1621.54 4890,1621.54 4985,1526.54 C27.2 5065.47,1417.68 R25.2 5100.47,1220 5225.47,1220 R22.1 5191.65,1146.18 U7.1
NetC31_1: C31.1 D11.1 L3.2 Q11.2 Q12.3@4715,2185 U8.22 | length 2243.5
  Signal Layer 1 w10: D11.1 4715,2028.62 Q12.3@4715,2185 ; C31.1 4910,2380 Q12.3@4715,2185 ; U8.22 5295.24,1398.82 L3.2 4799.45,1894.61 Q11.2 4799.45,2100.55 Q12.3@4715,2185
NetC31_2: C31.2 D12.2 U8.24 | length 1803.9
  Signal Layer 1 w10: C31.2 5280,2380 5445,2215 v1(5445,1805) ; v1(5637.64,1347.64) U8.24 5867.36,1347.64 5890,1325 5890,1145 D12.2
  Signal Layer 2 w10: v1(5445,1805) 5445,1540.28 v1(5637.64,1347.64)
NetC32_1: C32.1 D14.2 L3.1 Q9.3@5553.46,2185 Q10.2 U8.15 | length 1741.9
  Signal Layer 1 w10: Q10.2 5650.63,2114.37 5580,2185 5553.46,2185 5513.62,2145.16 D14.2 5510,1936.38 v1(5510,1755) 5510,1565.94 L3.1 5523.9,1577.95 U8.15 ; v1(5770,1280) C32.1
  Signal Layer 2 w10: v1(5510,1755) 5510,1540 v1(5770,1280)
NetC32_2: C32.2 D13.2 U8.13 | length 569.1
  Signal Layer 1 w10: U8.13 5920.87,1629.13 5956.18,1593.82 5956.18,1288.03 C32.2 5948.15,1185.91 D13.2
NetC33_2: C33.2 U8.12 | length 76.4
  Signal Layer 1 w10: U8.12 6081.3,1630.43 C33.2
NetC34_2: C34.2 D12.1 D13.1 R24.1 U8.19 | length 1010.8
  Signal Layer 1 w10: U8.19 5894.41,1475.59 5925,1445 5925,1400 5905,1380 5905,1155 5915,1145 5980,1145 6020,1185 R24.1 6080.94,1234.06 D13.1 ; D12.1 6080.94,1085.94 D13.1 ; C34.2 D13.1
NetC35_2: C35.2 U8.2 | length 167.6
  Signal Layer 1 w10: U8.2 6081.77,1375 C35.2
NetC36_1: C36.1 R31.1 U8.4 | length 335.9
  Signal Layer 1 w10: U8.4 6145.62,1424.41 6205,1483.79 6205,1513.15 C36.1 6256.85,1565 R31.1
NetC36_2: C36.2 R27.1 U8.3 | length 284.8
  Signal Layer 1 w10: U8.3 6143.82,1398.82 6201.85,1456.85 C36.2 6338.15,1456.85 R27.1
NetC37_2: C37.2 R26.1 | length 157.2
  Signal Layer 1 w10: R26.1 6428.7,1655 C37.2
NetC38_2: C38.2 R26.2 U8.5 | length 398
  Signal Layer 1 w10: U8.5 6150,1450 6190,1490 6190,1609.53 R26.2 6253.7,1673.23 C38.2
NetC39_2: C39.2 D16.2 R33.1 R35.2 U9.1 | length 641.6
  Signal Layer 1 w10: R33.1 U9.1@4373.82,3043.82 ; U9.1 U9.1@4373.82,3043.82 ; C39.2 D16.2@4426.85,3295 ; R35.2 4465.47,3295 D16.2@4426.85,3295 ; U9.1@4373.82,3043.82 4366.18,3043.82 4350,3060 4350,3251.42 D16.2 D16.2@4426.85,3295
NetC40_2: C40.2 U10.32 | length 149.5
  Signal Layer 1 w10: U10.32 4433.94,3600.16 4508.79,3675 C40.2
NetC41_2: C41.2 R38.1 | length 66.2
  Signal Layer 1 w10: R38.1 4545,3575 C41.2
NetC42_2: C42.2 U10.28 | length 94.6
  Signal Layer 1 w10: U10.28 4446.34,3515.51 C42.2
NetC43_2: C43.2 D17.2 R40.1 R42.2 U11.1 | length 659.8
  Signal Layer 1 w10: C43.2 D17.2@1993.15,3465 ; R42.2 1964.53,3465 D17.2@1993.15,3465 ; U11.1 U11.1@2036.06,3745.59 ; R40.1 U11.1@2036.06,3745.59 ; D17.2@1993.15,3465 D17.2 2065,3493.58 2065,3735 2054.41,3745.59 U11.1@2036.06,3745.59
NetC44_2: C44.2 U12.32 | length 396
  Signal Layer 1 w10: C44.2 1691.85,3145 2005,3145 2019.84,3159.84 U12.32
NetC45_2: C45.2 R45.1 | length 73.3
  Signal Layer 1 w10: C45.2 1851.3,3200 R45.1
NetC46_2: C46.2 U12.28 | length 101.7
  Signal Layer 1 w10: C46.2 2003.66,3244.49 U12.28
NetD4_1: D4.1 Q2.2 Q4.2 R9.2 R10.2 R11.2 | length 2060.4
  Signal Layer 1 w10: Q4.2 1074.45,1581.38 Q2.2 1256.18,1761.85 D4.1 1420,1766.85 v1(1420,1861.85) ; v1(1820,2930.91) R9.2 1909.53,2911.38 R11.2 R10.2@1854.53,3012.32
  Signal Layer 2 w10: v1(1420,1861.85) 1420,2492.35 1460,2532.35 1460,2570.91 v1(1820,2930.91)
NetD5_2: D5.2 R3.1 U4.8 | length 420
  Signal Layer 1 w10: R3.1 1484.09,2676.81 D5.2 1740.04,2676.81 1801.18,2615.67 U4.8
NetD9_1: D9.1 Q5.2 Q8.2 R17.2 R18.2 R19.2 | length 2155.9
  Signal Layer 1 w10: R18.2 R19.2 2545.47,2485 R17.2 v1(2500.47,2420) ; v1(3640,1985) 3723.74,1985 3728.74,1990 3729.37,1989.37 Q5.2 3910.47,1649.45 Q8.2
  Signal Layer 2 w10: v1(2500.47,2420) 2955,2420 3390,1985 v1(3640,1985)
NetD10_2: D10.2 R13.1 U6.8 | length 431.9
  Signal Layer 1 w10: R13.1 2800.04,2064.57 D10.2 2800.04,2340.04 2847.64,2387.64 U6.8
NetD14_1: D14.1 Q9.2 Q12.2 R27.2 R28.2 R29.2 | length 2074.2
  Signal Layer 1 w10: Q12.2 5049.53,2275.55 Q9.2 5230.63,1949.37 D14.1 5245,1935 v1(5370,1935) ; R29.2 6425,1275.47 R28.2 6399.06,1420.94 R27.2 6445,1500.94 v1(6445,1510)
  Signal Layer 2 w10: v1(5370,1935) 5605,1935 6030,1510 v1(6445,1510)
NetD15_2: D15.2 R23.1 U8.8 | length 456.2
  Signal Layer 1 w10: U8.8 6116.77,1526.77 6174.96,1584.96 D15.2 6174.96,1865.43 R23.1
NetD16_1: D16.1 L4.2 U10.8 U10.9 U10.20 U10.21 U10.38 | length 656.9
  Signal Layer 1 w10: D16.1 4134.76,3295 L4.2 4195.28,3515.51 U10.20 U10.21 U10.8 U10.9
NetD17_1: D17.1 L5.2 U12.8 U12.9 U12.20 U12.21 U12.38 | length 686.4
  Signal Layer 1 w10: D17.1 2310,3465 L5.2 2269.49,3244.49 U12.20 U12.21 U12.8 U12.9
NetP2_3: P2.3 R1.2 U2.8 U13.10 | length 3858.4
  Signal Layer 1 w15: R1.2 2805.59,1330.59 U2.8 3063.35,1330.59 U13.10
  Signal Layer 2 w15: U13.10 3130,1279.13 3130,1205 3165,1170 4050,1170 4175,1295 4175,2345 P2.3
NetP2_9: P2.9 U2.5 | length 4186.4
  Signal Layer 1 w10: U2.5 2881.18,1253.82 3100,1035 4005,1035 4475,1505 4475,2380 5165,3070 5500,3070 P2.9
NetP2_10: P2.10 U3.5 | length 4610.6
  Signal Layer 1 w10: U3.5 2907.09,1822.91 3195,1535 v1(3510,1535) ; v1(4100,2640) 4270,2640 4415,2785 4415,2880 4700,3165 5605,3165 P2.10
  Signal Layer 2 w10: v1(3510,1535) 3665,1535 4100,1970 v1(4100,2640)
NetP2_11: P2.11 U5.5 | length 2233.5
  Signal Layer 1 w10: U5.5 3735.91,2910 4405,2910 4700,3205 5665,3205 P2.11
NetP2_12: P2.12 U7.5 | length 3489.6
  Signal Layer 1 w10: U7.5 5332.32,1040 6340,1040 6530,1230 6530,2440 P2.12
NetP2_13: P2.13 U9.5 | length 1928.4
  Signal Layer 1 w10: U9.5 4259.41,3120.59 v1(4295,3085) ; v1(4780,3300) 5770,3300 P2.13
  Signal Layer 2 w10: v1(4295,3085) 4510,3300 v1(4780,3300)
NetP2_14: P2.14 U11.5 | length 4176
  Signal Layer 1 w10: U11.5 2378.82,3668.82 2510,3800 5370,3800 P2.14
NetQ5_1: Q5.1 U6.16 | length 1205.1
  Signal Layer 1 w10: v1(3092.95,2362.05) U6.16 ; Q5.1 3755,1675.08 v1(3755,1740)
  Signal Layer 2 w10: v1(3092.95,2362.05) 3425,2030 3665,2030 3755,1940 v1(3755,1740)
NetQ6_1: Q6.1 U6.14 | length 668.2
  Signal Layer 1 w10: Q6.1 3080,1851.61 3080,2245 3095,2260 3190,2260 3205,2275 3205,2300 3194.13,2310.87 U6.14
NetQ7_1: Q7.1 U6.23 | length 1101.2
  Signal Layer 1 w10: U6.23 3302.86,2541.18 3312.27,2531.77 3366.77,2531.77 v1(3400,2565) ; v1(3870,2095) 3989.37,1975.63 Q7.1
  Signal Layer 2 w10: v1(3400,2565) v1(3870,2095)
NetQ8_1: Q8.1 U6.18 | length 1220
  Signal Layer 1 w10: v1(3056.77,2413.23) U6.18 ; v1(3830,1895) 3894.45,1830.55 Q8.1
  Signal Layer 2 w10: v1(3056.77,2413.23) 3106.77,2413.23 3475,2045 3671.21,2045 3821.21,1895 v1(3830,1895)
NetQ9_1: Q9.1 U8.16 | length 1222.3
  Signal Layer 1 w10: v1(5210,2185) 5210,2254.92 Q9.1 ; U8.16 v1(5882.64,1552.36)
  Signal Layer 2 w10: v1(5210,2185) 5210,1980 5295,1895 5540,1895 v1(5882.64,1552.36)
NetQ10_1: Q10.1 U8.14 | length 673.3
  Signal Layer 1 w10: U8.14 5781.46,1603.54 5770,1615 5770,1635 5785,1650 5875,1650 5895,1670 5895,2064.92 Q10.1
NetQ11_1: Q11.1 U8.23 | length 1113.1
  Signal Layer 1 w10: Q11.1 4980.55,1924.45 v1(5075,1830) ; v1(5560,1345) 5597.64,1382.64 5652.14,1382.64 5661.54,1373.23 U8.23
  Signal Layer 2 w10: v1(5075,1830) v1(5560,1345)
NetQ12_1: Q12.1 U8.18 | length 1269.6
  Signal Layer 1 w10: Q12.1 5037.83,2037.17 v1(5055,2020) ; U8.18 v1(5921.18,1501.18)
  Signal Layer 2 w10: v1(5055,2020) 5220,1855 5480,1855 5833.82,1501.18 v1(5921.18,1501.18)
NetR2_2: R2.2 U3.8 U13.11 | length 1240.9
  Signal Layer 1 w10: U3.8@2219.96,1819.06 U3.8
  Signal Layer 1 w20: R2.2 U3.8@2219.96,1819.06 ; U3.8 2223.82,1781.18 2375,1630 2897.24,1630 U13.11
NetR4_1: R4.1 R7.2 U4.6 | length 1043.3
  Signal Layer 1 w10: U4.6 1852.36,2544.49 v1(1880,2516.85) ; R4.1 2110.47,1651.85 R7.2 2110,1707.32 v1(2110,1851.85)
  Signal Layer 2 w10: v1(1880,2516.85) 2110,2286.85 v1(2110,1851.85)
NetR5_2: R5.2 U4.1 | length 60.2
  Signal Layer 1 w10: U4.1 2038.78,2587.6 R5.2
NetR12_2: R12.2 U5.8 U13.12 | length 1770.1
  Signal Layer 1 w10: 3692.09,2780 U5.8
  Signal Layer 1 w45: v1(3515,2735) R12.2 3690.94,2778.86 ; v1(3585,1785) v1(3585,2470)
  Signal Layer 2 w45: U13.12 3307.17,1507.17 v1(3585,1785) ; v1(3515,2735) 3515,2540 v1(3585,2470)
NetR14_2: R14.2 U6.1 | length 53.7
  Signal Layer 1 w10: U6.1 2894.25,2618.78 R14.2
NetR15_1: R15.1 R20.2 U6.6 | length 1073.1
  Signal Layer 1 w10: U6.6 2938.82,2438.82 v1(2965,2465) ; v1(3390,2680) R20.2@3814.53,2680 ; R20.2 3854.53,2680.94 R15.1
  Signal Layer 2 w10: v1(2965,2465) 3180,2680 v1(3390,2680)
NetR22_2: R22.2 U7.8 U13.13 | length 2516
  Signal Layer 1 w10: U7.8 5302.91,1165
  Signal Layer 1 w50: U13.13 3527.09,1440 v1(4215,1440) ; 5302.91,1165 5304.53,1166.61 R22.2 v1(5500,1200)
  Signal Layer 2 w50: v1(4215,1440) 4515,1140 5440,1140 v1(5500,1200)
NetR24_2: R24.2 U8.1 | length 53
  Signal Layer 1 w10: R24.2 6079.06,1346.69 U8.1
NetR25_1: R25.1 R30.2 U8.6 | length 1071.7
  Signal Layer 1 w10: R25.1 5174.53,1255 R30.2 5184.53,1245 5204.53,1265 v1(5390,1265) ; v1(6005,1450) 6030.59,1475.59 U8.6
  Signal Layer 2 w10: v1(5390,1265) 5735.5,1265 5755.5,1245 5800,1245 v1(6005,1450)
NetR33_2: R33.2 U9.8 U13.14 | length 2103.1
  Signal Layer 1 w10: v1(4140,2990) R33.2 4207.13,3043.82 U9.8
  Signal Layer 2 w15: U13.14 4140,1934.8 v1(4140,2990)
NetR34_1: R34.1 R36.2 U10.25 | length 118
  Signal Layer 1 w10: R36.2 R34.1 4328.74,3453.74 U10.25
NetR35_1: R35.1 R39.2 U10.31 | length 430.4
  Signal Layer 1 w10: U10.31 4435.47,3580.47 4450,3595 4485,3595 4500,3580 4500,3540 4530,3510 4530,3389.53 R35.1 4575,3345.47 R39.2
NetR37_2: R37.2 U10.33 | length 182.7
  Signal Layer 1 w10: U10.33 4432.42,3619.84 4485,3672.43 4485,3701.01 4525.47,3741.49 R37.2
NetR38_2: R38.2 U10.30 | length 57.9
  Signal Layer 1 w10: U10.30 4414.17,3560 R38.2
NetR40_2: R40.2 U11.8 U13.15 | length 3564.5
  Signal Layer 1 w10: v1(2265,3790) 2270,3790 v1@2275,3795
  Signal Layer 1 w15: U11.8 2193.94,3745.59 R40.2 v1@2275,3795
  Signal Layer 2 w15: v1(2265,3790) 2265,2370 3250,1385 3250,1310 3280,1280 3603.31,1280 U13.15
NetR41_1: R41.1 R43.2 U12.25 | length 129.4
  Signal Layer 1 w10: U12.25 2121.26,3301.73 R41.1 R43.2
NetR42_1: R42.1 R46.2 U12.31 | length 449.1
  Signal Layer 1 w10: R46.2 1850.94,3419.53 R42.1 1940,3330.47 1940,3175 1950,3165 1995,3165 2009.53,3179.53 U12.31
NetR44_2: R44.2 U12.33 | length 500.8
  Signal Layer 1 w10: R44.2 1580,3165 1615,3130 2011.21,3130 2021.37,3140.16 U12.33
NetR45_2: R45.2 U12.30 | length 67.4
  Signal Layer 1 w10: R45.2 1970.32,3199.21 U12.30
NetU10_3: U10.3 U10.6 | length 108.9
  Signal Layer 1 w10: U10.6 4289.37,3729.37 4295,3735 4335,3735 4348.43,3721.57 U10.3
NetU12_3: U12.3 U12.6 | length 108.9
  Signal Layer 1 w10: U12.3 2101.57,3033.43 2110,3025 2150,3025 2160.63,3035.63 U12.6
TG1-9V: Q3.1 U4.23 | length 1085.7
  Signal Layer 1 w10: Q3.1 1495,1596.77 v1(1495,1606.85) ; U4.23 1954.72,2201.07 1944.13,2190.48 1944.13,2127.72 v1(1980,2091.85)
  Signal Layer 2 w10: v1(1495,1606.85) v1(1980,2091.85)
TG2-9V: Q1.1 U4.14 | length 663.2
  Signal Layer 1 w10: Q1.1 1270.08,2406.85 1640,2406.85 1660,2386.85 1660,2291.85 1680,2271.85 1710,2271.85 1724.41,2286.26 U4.14
pads on no net: P1.1 P1.2 P1.3 P1.4 P1.5 P1.7 P1.8 P1.9 P1.10 P1.11 P1.12 P1.13 P1.14 P1.15 P1.16 P1.17 P2.1 P2.2 P2.5 P2.6 P2.7 P2.8 P2.15 P2.16 P2.17 Q1.3@1270,2276.85 Q2.3@1165,1801.85 Q3.3@1435,1406.85 Q4.3@1165,1526.85 Q5.3@3690,1740 Q6.3@3215,1846.54 Q7.3@4090,2015 Q8.3@3971.54,1740 Q9.3@5270,2185 Q10.3@5755,2075 Q11.3@4890,1905 Q12.3@4998.46,2185 U2.2 U2.3 U2.6 U2.7 U3.2 U3.3 U3.6 U3.7 U5.2 U5.3 U5.6 U5.7 U7.2 U7.3 U7.6 U7.7 U9.2 U9.3 U9.6 U9.7 U11.2 U11.3 U11.6 U11.7 U13.

## Polygon pours and split planes (outlines as drawn)
14.8V on Power Plane (split plane): 6544.9,1020.1 1020.1,1020.1 1020.1,3829.9 6544.9,3829.9
GND on Ground Plane (split plane): 6544.9,1020.1 1020.1,1020.1 1020.1,3829.9 6544.9,3829.9

## Silkscreen, mask and mechanical layers (free items; w line width, h text height)
Top Overlay:
  text "48V2" at 1505,3680 h100
  text "48V1" at 4780,3660 h100
  text "+-" at 2930,2815 h30
  text "12V" at 3235,2740 h100
  text "+-" at 2925,2710 h30
  text "+-" at 2125,2555 h30 r270
  text "+-" at 2225,2555 h30 r270
  text "9V" at 2055,2120 h100
  text "5V" at 2635,1375 h100
  text "+-" at 6040,1200 h30 r180
  text "+-" at 6040,1100 h30 r180
  text "19V" at 5500,1055 h100

## Text inside footprints (layer, text, board x,y; h text height)
L1: Top Overlay "1" at 1933.86,2038.7 h60 r270; Top Overlay "1" at 1933.86,2038.7 h60 r270; Top Overlay "2" at 1933.86,1668.62 h60 r270
L2: Top Overlay "1" at 3453.15,2503.86 h60; Top Overlay "1" at 3453.15,2503.86 h60; Top Overlay "2" at 3823.23,2503.86 h60
L3: Top Overlay "1" at 5516.85,1431.14 h60 r180; Top Overlay "1" at 5516.85,1431.14 h60 r180; Top Overlay "2" at 5146.77,1431.14 h60 r180
L4: Top Overlay "1" at 3533.11,3369.88 h60; Top Overlay "2" at 3905.94,3367.13 h60
L5: Top Overlay "1" at 2921.65,3380.12 h60 r180; Top Overlay "2" at 2548.82,3382.87 h60 r180
U10: Top Overlay "1" at 4387.8,3683.82 h9.84 r180
U12: Top Overlay "1" at 2062.2,3076.18 h9.84